# Altium PCB PCB1.PcbDoc (part 2 of 3)
Units mm, origin at the board's own origin, x right, y up, seen from the top; angles counter-clockwise.
Board outline 160 x 120 mm, 2 copper layers (Top Layer, Bottom Layer), stack 1.575 mm thick; 297 components, 194 nets, 893 pads, 504 vias.
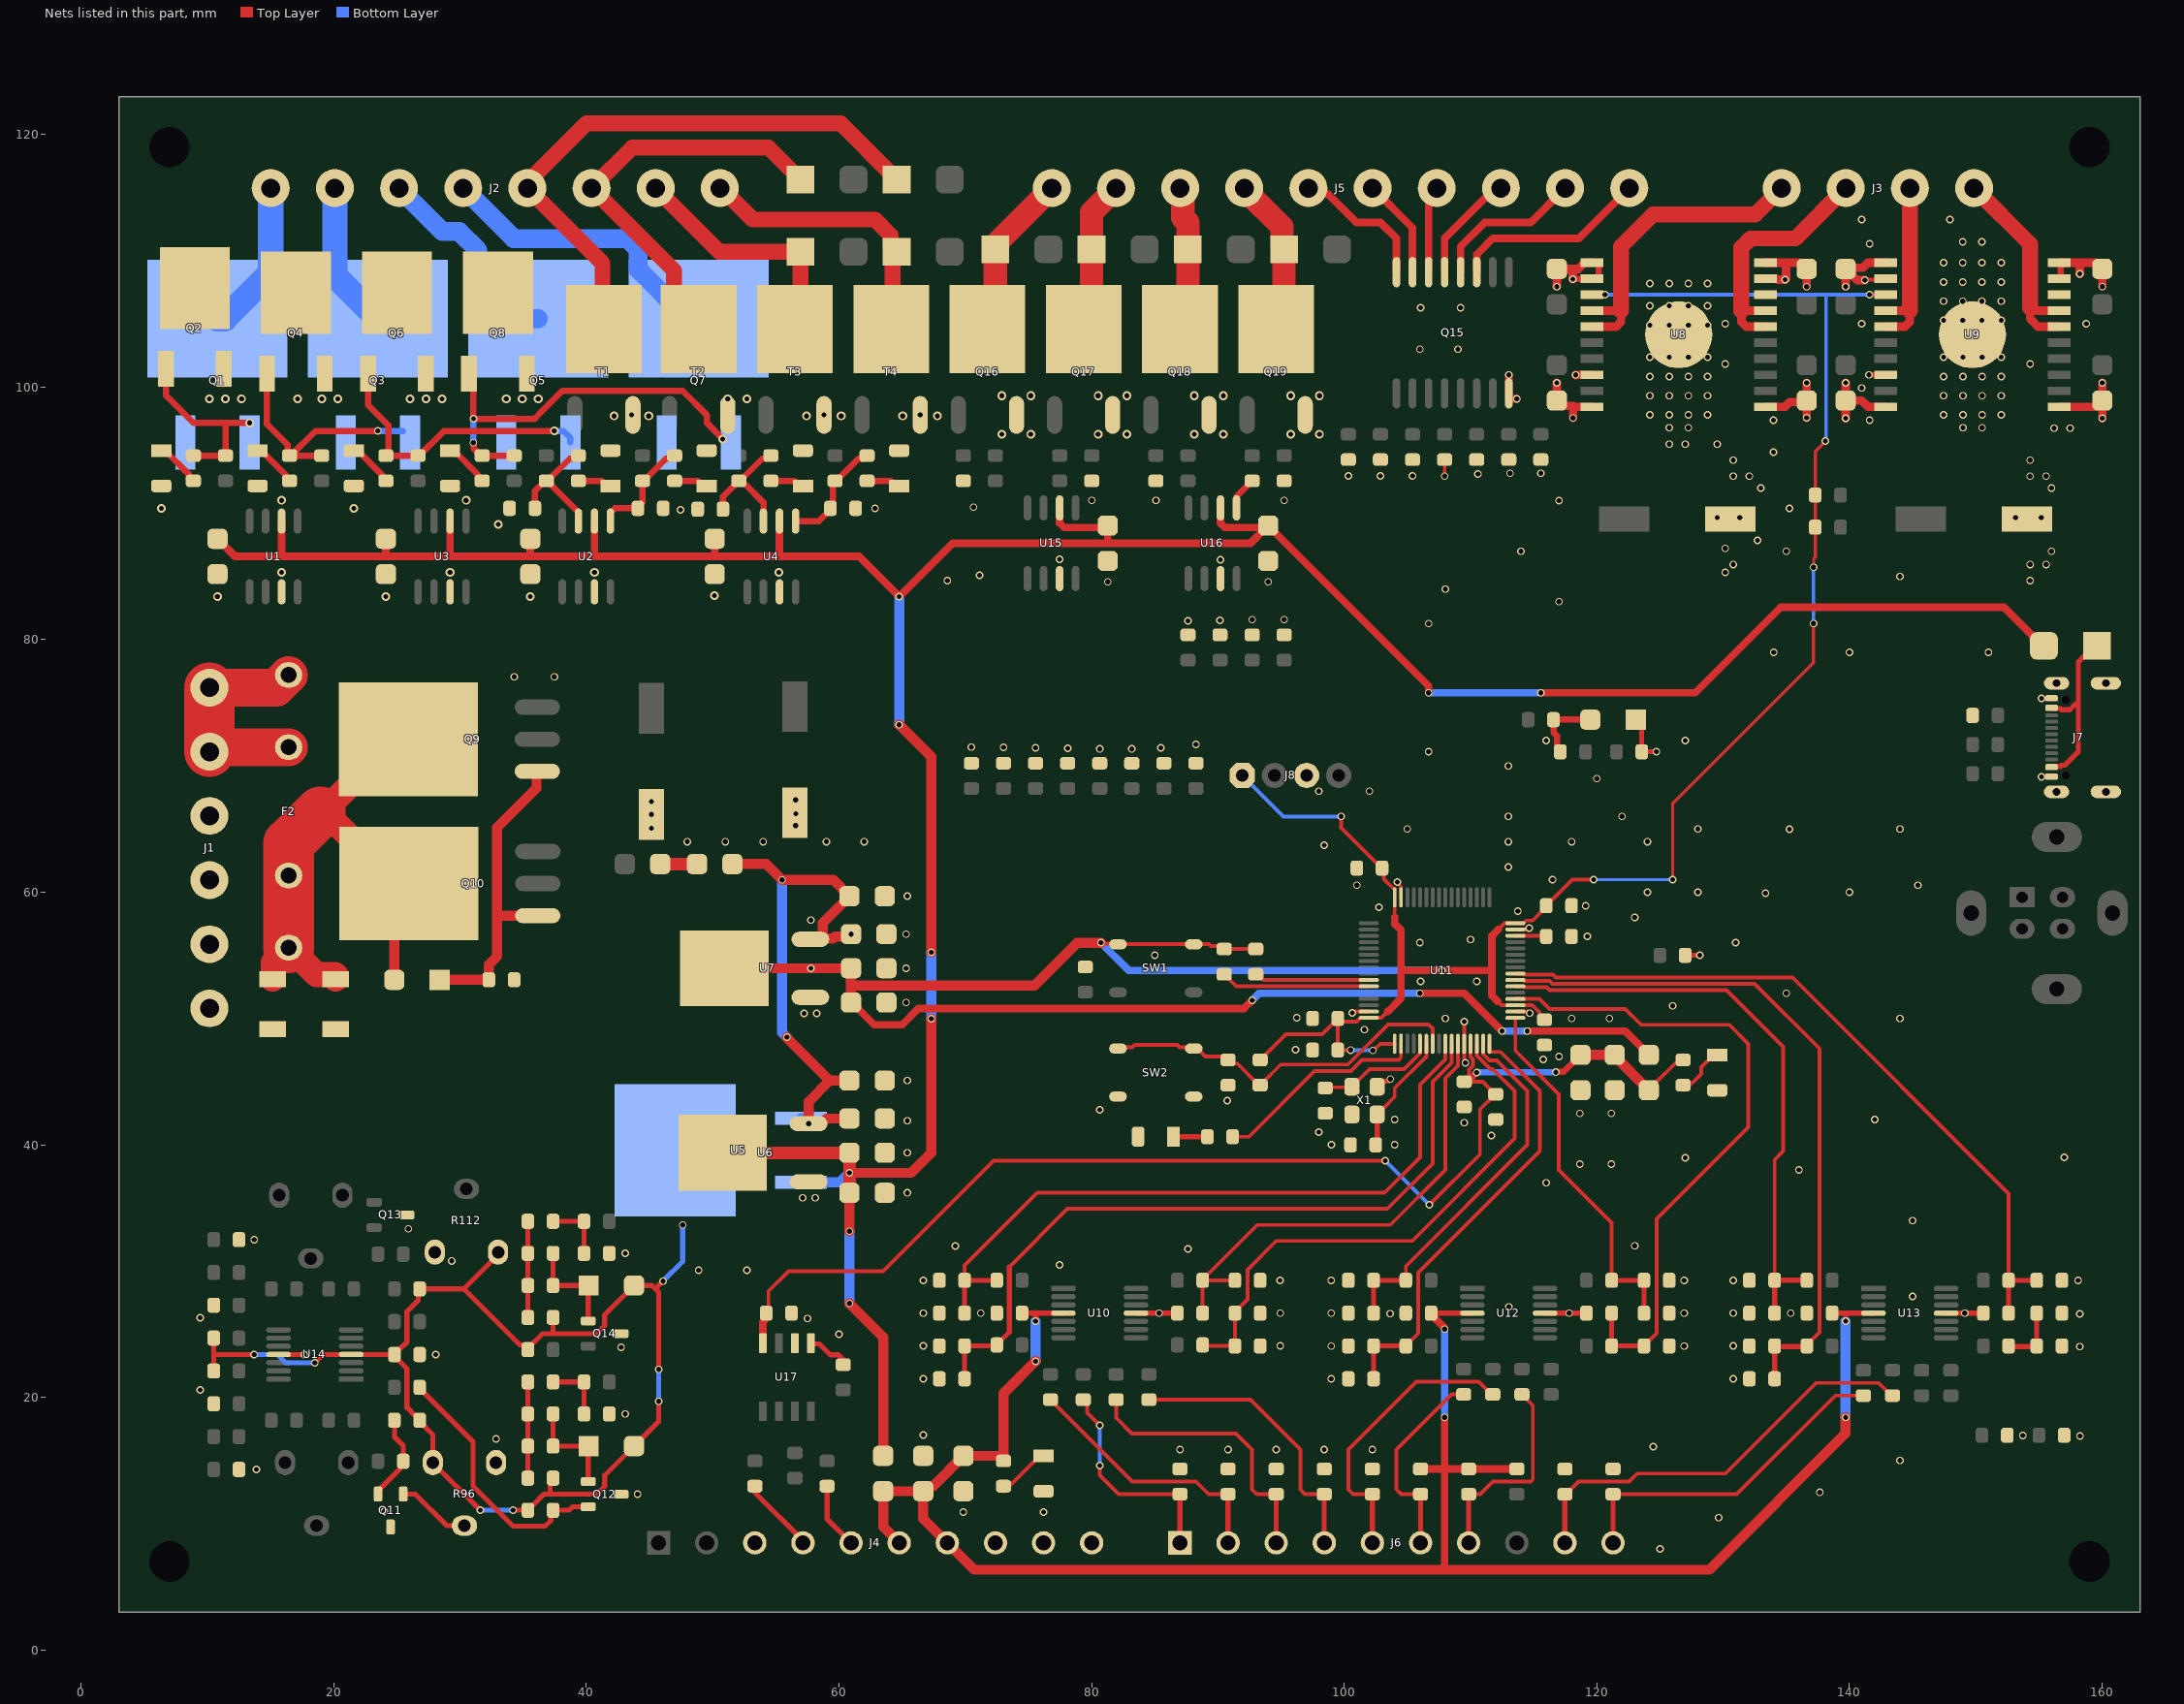
[diagram p2: the nets of this part, all layers, seen from the top]

## Via types
v1: diameter 0.6, hole 0.4, Top Layer to Bottom Layer, 445 vias
v2: diameter 0.7, hole 0.4, Top Layer to Bottom Layer, 59 vias

## Nets (pads, with @x,y where several pads share a name; then routed paths per layer and width w, separated by ;. In a path a pad name is that pad's centre, name@x,y a point inside that pad or via, vN(x,y) a via of type N, cw(c..) or ccw(c..) an arc to the next point about the centre after c; other vN are vias at no path point)
3.3V: C15.2 C16.2 C30.2 C31.2 C32.2 C33.2 C34.2 FB3.2 J8.1 R32.2 R33.2 R45.2 R66.2 R67.2 SW1.1 SW1.4 U7.4 U8.13 U9.13 U11.1 U11.19 U11.32 U11.48 U11.64 | length 295.4
  Top Layer w0.254: v1(126,61) 126,67 137.16,78.16 v1(137.16,81.273) ; v1(137.16,85.725) 137.168,85.733 137.168,86.406 137.295,86.533 R33.2@137.295,88.9 R32.2@137.295,91.44 137.295,94.915 v1(138.095,95.715)
  Top Layer w0.3: v1(80.75,56) 80.807,55.943 82.072,55.943 82.115,55.9 88.065,55.9 SW1.4@88.09,55.875 88.115,55.9 89.3,55.9 89.45,55.75 90.25,55.75 R67.2@90.5,55.5 R66.2@93,55.5 ; R45.2@93.345,46.72 93.391,46.72 93.795,47.124 93.795,47.17 95.39,48.765 98.265,48.765 C31.2@99.5,50 ; C30.2@99.5,47.5 v1(100.5,47.5) ; C30.2@99.695,47.625 99.5,47.82 C31.2@99.5,50 ; v1(99.75,66) 99.75,65.114 102.566,62.298 102.658,62.298 102.664,62.292 102.664,62.2 C33.2@102.977,61.887 ; v1(102.274,47.476) 102.324,47.476 102.849,48 U11.1@104,48 ; C33.2@103,61.91 103.125,61.784 103.125,61.045 103.957,60.214 104,60.214 U11.48@104,59.6 104,58 ; 103.45,50.55 102.95,50.05 U11.64@101.95,50.05 101.3,50.05 101,49.75 99.75,49.75 C31.2@99.5,50 ; 112.15,51.35 112.45,51.05 U11.19@113.55,51.05 114.897,51.05 115.472,50.476 115.472,50.237 115.814,49.895 C34.2@115.86,49.895 ; 112.2,57.05 112.7,57.55 U11.32@113.55,57.55 U11.32@114.2,57.55 ; U11.32@114.2,57.551 114.399,57.75 114.917,57.75 116,58.833 116,58.978 116.342,59.321 116.388,59.321 118.067,61 v1(119.742,61) ; U8.13@119.62,107.315 v1(120.65,107.315) ; v1(141.605,107.315) U9.13@142.875,107.315
  Top Layer w0.6: C16.2@60.957,51.267 61.011,51.267 62.778,49.5 65,49.5 66.3,50.8 92.075,50.8 v1(92.71,51.435) ; 103.45,50.55 104.5,51.6 104.5,53.8 ; 104,58 104,57.5 104.5,57 104.5,53.8 ; v1(106,52) 109.5,52 v1(112.5,49) ; 112.15,51.35 111.7,51.8 111.7,53.8 ; 112.2,57.05 111.7,56.55 111.7,53.8 ; v1(114.5,49) 122.243,49 FB3.2@124.123,47.12 ; 104.5,53.8 v1(107.75,53.8) 111.7,53.8
  Top Layer w0.8: U7.4@50.927,53.975 50.99,53.975 v1(57.785,53.975) C15.2@60.957,53.975 60.957,52.621 ; C16.2@60.957,51.267 60.957,52.621 ; v1(80.75,56) 78.86,56 75.481,52.621 60.957,52.621
  Bottom Layer w0.254: v1(119.742,61) v1(126,61) ; v1(137.16,81.273) v1(137.16,85.725) ; v1(138.095,95.715) 138.141,95.761 138.141,107.315
  Bottom Layer w0.3: J8.1@91.94,69.25 95.19,66 v1(99.75,66) ; v1(100.5,47.5) 100.512,47.488 102.262,47.488 v1(102.274,47.476) ; v1(120.65,107.315) 138.141,107.315 v1(141.605,107.315)
  Bottom Layer w0.6: v1(80.75,56) 82.95,53.8 v1(107.75,53.8) ; v1(92.71,51.435) 93.275,52 v1(106,52) ; v1(112.5,49) v1(114.5,49)
3.3VA: C17.2 C18.2 C35.2 C36.2 C63.2 FB3.1 R31.2 U11.13 U17.8 | length 99.5
  Top Layer w0.3: C63.2@54.245,26.673 54.42,26.848 54.42,28.42 56,30 63.5,30 72.25,38.75 v1(103.25,38.75) ; v1(106.75,35.25) 110.75,39.25 110.75,42.8 111.95,44 C36.2@111.954,44 ; C35.2@109.5,45 C35.2@109.546,45 ; C35.2@109.743,45.197 C35.2@109.546,45 ; C35.2@109.888,45.342 109.888,45.94 110.2,46.251 110.2,46.749 110,46.949 U11.13@110,48 ; C36.2@112,44 C36.2@111.954,44 ; FB3.1@124.123,44.366 126.832,47.074 R31.2@126.832,47.12 ; C35.2@109.546,45 109.855,45 110,45 110.974,45 111.15,44.824 111.15,44.804 C36.2@111.954,44
  Top Layer w0.5: C35.2@109.855,45.085 110,45.23 v1(110.49,45.72) ; v1(116.75,45.75) 116.769,45.769 117.356,45.769 C17.2@118.707,47.12
  Top Layer w0.6: U17.8@53.975,24.29 53.975,25.965 54.045,26.035 54.045,26.473 C63.2@54.245,26.673
  Top Layer w0.8: C17.2@118.707,47.12 121.323,47.12 124.077,44.366 FB3.1@124.123,44.366
  Bottom Layer w0.3: v1(103.25,38.75) v1(106.75,35.25)
  Bottom Layer w0.5: v1(110.49,45.72) 110.505,45.735 116.735,45.735 v1(116.75,45.75)
5V: C1.2 C2.2 C3.2 C4.2 C9.2 C10.2 C58.2 C61.2 C62.2 D20.2 D21.2 D22.2 FB2.2 R93.1 R96.3 R100.2 R102.1 R104.1 R109.1 R112.3 R116.2 R118.1 R120.1 U1.6 U2.6 U3.6 U4.6 U5.3 U6.4 U14.4 U15.6 U16.6 | length 380.5
  Top Layer w0.4: R116.2@10.5,24.694 10.5,23.394 ; R100.2@10.766,22.361 R100.2@10.5,22.094 10.5,23.394 ; v1(13.696,23.394) 10.5,23.394 ; v1(18.505,22.74) 19.159,23.394 U14.4@21.38,23.394 C58.2@24.8,23.394 ; v1(31.601,11.065) 27.85,14.816 R96.3@27.85,14.844 27.85,17.044 26.8,18.094 R93.1@26.8,18.194 26.8,18.267 26.504,18.563 26.431,18.563 25.8,19.194 25.8,22.26 25.1,22.96 25.1,22.967 24.8,23.267 C58.2@24.8,23.394 ; R112.3@33.008,31.503 33.008,31.303 30.3,28.594 ; v1(34.195,11.065) 35.297,11.065 35.666,11.434 35.739,11.434 36.64,12.335 37.139,12.335 ; R118.1@35.37,23.78 35.37,23.853 35.074,24.149 34.745,24.149 34.314,24.58 30.3,28.594 ; R118.1@35.37,23.88 36.54,25.05 37.37,25.05 ; R104.1@37.37,13.605 37.139,13.374 37.139,12.335 ; R120.1@37.37,26.32 37.37,25.05 ; v1(45.72,19.685) 45.72,18.085 41.45,13.815 41.45,12.97 40.815,12.335 37.139,12.335 ; v1(45.72,22.225) 45.72,28.341 45.46,28.6 ; v1(46.07,29.21) 45.46,28.6 ; C58.2@24.8,23.394 24.8,23.467 25.096,23.763 25.169,23.763 25.8,24.394 25.8,26.796 26.698,27.694 26.698,28.493 R109.1@26.8,28.594 30.3,28.594 ; 37.37,25.05 40.815,25.05 41.45,25.685 41.45,26.53 D22.2@43.78,28.86 45.201,28.86 45.46,28.6
  Top Layer w0.6: C1.2@10.795,87.985 12.195,86.585 15.875,86.585 ; U1.6@15.875,89.385 15.875,86.585 ; C3.2@24.13,87.985 24.13,86.585 ; U3.6@29.21,89.385 29.21,86.585 ; C2.2@35.56,87.985 35.56,86.585 ; U2.6@40.64,89.385 40.64,86.585 ; C4.2@50.165,87.985 50.165,86.585 ; U4.6@55.292,89.385 55.292,86.632 55.245,86.585 ; U15.6@77.47,90.43 77.47,89.222 77.821,88.87 81.12,88.87 C61.2@81.28,89.03 81.28,87.63 ; U16.6@90.207,90.43 90.207,89.222 90.558,88.87 C62.2@93.82,88.87 ; v1(106.68,75.79) 106.68,76.33 C62.2@93.98,89.03 C62.2@93.82,88.87 ; v1(115.57,75.79) 127.79,75.79 134.55,82.55 152.25,82.55 154.562,80.238 154.562,79.992 155.054,79.5 D20.2@155.3,79.5 ; 15.875,86.585 24.13,86.585 ; 24.13,86.585 29.21,86.585 ; 29.21,86.585 35.56,86.585 ; 35.56,86.585 40.64,86.585 ; 40.64,86.585 50.165,86.585 ; 50.165,86.585 55.245,86.585 ; 55.245,86.585 61.595,86.585 v1(64.77,83.41) 68.99,87.63 81.28,87.63 ; 81.28,87.63 92.58,87.63 C62.2@93.82,88.87
  Top Layer w0.8: v1(60.83,27.435) 63.5,24.765 FB2.2@63.5,15.37 ; v1(60.83,33.15) C10.2@60.83,36.195 ; v1(60.83,37.782) 65.722,37.782 67.31,39.37 v1(67.31,49.973) ; v1(64.77,73.25) 67.31,70.71 v1(67.31,55.245)
  Top Layer w1: U6.4@50.8,39.37 C9.2@60.83,39.37 v1(60.83,37.782) C10.2@60.83,36.195
  Bottom Layer w0.4: v1(13.696,23.394) 15.549,23.394 16.203,22.74 v1(18.505,22.74) ; v1(31.601,11.065) v1(34.195,11.065) ; v1(45.72,19.685) v1(45.72,22.225) ; v1(46.07,29.21) 47.625,30.765 v1(47.625,33.655)
  Bottom Layer w0.6: v1(106.68,75.79) v1(115.57,75.79)
  Bottom Layer w0.8: U5.3@56.996,37.02 60.068,37.02 v1(60.83,37.782) ; v1(60.83,27.435) v1(60.83,33.15) ; v1(64.77,73.25) v1(64.77,83.41) ; v1(67.31,49.973) v1(67.31,55.245)
5VA: C11.2 C12.2 C53.2 C54.2 C55.2 FB2.1 J4.6 J4.7 R29.2 R58.2 R64.2 R73.2 U10.4 U12.4 U13.4 | length 156.7
  Top Layer w0.3: v1(139.7,26.035) 139.7,26.674
  Top Layer w0.4: C53.2@74.495,26.67 75.565,26.67 U10.4@77.77,26.67 ; C54.2@106.88,26.67 U12.4@110.155,26.67 ; C55.2@138.63,26.67 138.63,26.674 139.7,26.674 141.901,26.674 U13.4@141.905,26.67
  Top Layer w0.5: v1(75.565,26.035) 75.565,26.67
  Top Layer w0.6: R58.2@106.045,14.335 107.95,14.335 ; C54.2@106.88,26.67 106.88,26.57 107.95,25.5 v1(107.95,25.4) ; 107.95,6.35 107.95,14.335 ; v1(107.95,18.415) 107.95,14.335 ; R73.2@113.665,14.335 R64.2@109.855,14.335 107.95,14.335
  Top Layer w0.8: J4.6@64.77,8.48 63.5,9.75 FB2.1@63.5,12.57 C11.2@66.675,12.57 ; v1(75.565,22.86) 73.025,20.32 73.025,15.37 70.168,15.37 C12.2@69.85,15.37 67.45,12.97 67.075,12.97 C11.2@66.675,12.57 ; v1(139.7,18.415) 139.7,17.145 128.905,6.35 107.95,6.35 70.71,6.35 J4.7@68.58,8.48 66.675,10.385 C11.2@66.675,12.57
  Bottom Layer w0.6: v1(107.95,18.415) v1(107.95,25.4)
  Bottom Layer w0.8: v1(75.565,22.86) v1(75.565,26.035) ; v1(139.7,18.415) v1(139.7,26.035)
+EGT: J4.5 R145.1 | length 4.9
  Top Layer w0.4: R145.1@59.055,12.57 59.055,10.385 J4.5@60.96,8.48
-EGT: J4.4 R144.2 | length 5.7
  Top Layer w0.4: R144.2@53.34,12.57 53.34,12.462 57.15,8.652 J4.4@57.15,8.48
ANALOG-INPUT-1: J6.9 R77.2 R79.1 | length 33.9
  Top Layer w0.3: R79.1@117.475,12.335 117.575,12.335 118.575,13.335 122.555,13.335 123.19,13.97 130.175,13.97 137.35,21.145 142.314,21.145 143.314,20.145 R77.2@143.414,20.145
  Top Layer w0.4: J6.9@117.475,8.48 R79.1@117.475,12.335
ANALOG-INPUT-2: J6.10 R81.2 R83.1 | length 26.9
  Top Layer w0.3: R83.1@121.285,12.335 131.08,12.335 138.89,20.145 R81.2@141.105,20.145
  Top Layer w0.4: J6.10@121.285,8.48 R83.1@121.285,12.335
AUX_RELAY_OUT: J5.8 Q15.13 | length 8.8
  Top Layer w0.6: Q15.13@107.95,109.095 107.95,111.76 111.94,115.75 J5.8@112.41,115.75
CLT-SENSOR: J6.7 R64.1 R65.2 | length 16.5
  Top Layer w0.3: R64.1@109.855,12.335 110.76,12.335 111.76,13.335 114.759,13.335 114.935,13.511 114.935,19.372 R65.2@114.072,20.236
  Top Layer w0.4: J6.7@109.855,8.48 R64.1@109.855,12.335
COND-ANALOG-INPUT-1: C49.2 R78.1 R80.1 U11.22 | length 47.1
  Top Layer w0.3: U11.22@113.55,52.55 114.2,52.55 114.273,52.477 116.023,52.477 116.25,52.25 130.25,52.25 134.75,47.75 134.75,39.5 134.08,38.83 R80.1@134.08,29.27
  Top Layer w0.4: C49.2@134.08,26.67 R80.1@134.08,29.27 134.206,29.274 136.626,29.274 R78.1@136.63,29.27
COND-ANALOG-INPUT-2: C50.2 R82.1 R84.1 U11.23 | length 55.5
  Top Layer w0.3: U11.23@113.55,53.05 114.2,53.05 114.273,52.977 116.273,52.977 116.5,52.75 132.5,52.75 137.63,47.62 137.63,25.17 136.584,24.124 136.584,24.07 R82.1@136.584,24.024
  Top Layer w0.4: C50.2@134.08,21.47 134.08,23.898 R84.1@134.206,24.024 ; R84.1@134.08,24.07 134.08,24.024 R84.1@134.206,24.024 ; R82.1@136.584,24.024 R84.1@134.206,24.024
COND-ANALOG-INPUT-3: C51.2 R86.1 R88.1 U11.24 | length 57.9
  Top Layer w0.3: U11.24@113.55,53.55 114.2,53.55 114.273,53.477 116.523,53.477 116.75,53.25 135.5,53.25 152.605,36.145 R86.1@152.605,29.27
  Top Layer w0.4: R88.1@152.605,26.67 R86.1@152.605,29.27 ; R86.1@152.731,29.224 152.777,29.27 C51.2@154.83,29.27
COND-ANALOG-INPUT-4: C52.2 R90.1 R92.1 | length 4.9
  Top Layer w0.4: R90.1@152.731,24.024 152.806,24.024 152.856,24.074 152.906,24.024 R92.1@154.956,24.024 ; R92.1@154.83,24.07 C52.2@154.83,26.67
COND-CLT-SENSOR: C46.2 R69.1 R70.1 U11.17 | length 29.1
  Top Layer w0.3: U11.17@113.55,50.05 113.55,47.45 117,44 117,38 121.18,33.82 R69.1@121.18,29.27
  Top Layer w0.4: R69.1@121.18,29.27 R70.1@123.73,29.27 C46.2@123.73,26.67
COND-ETB-1-SENSOR-1: C29.2 R35.1 R37.1 U11.9 | length 56.2
  Top Layer w0.3: R37.1@69.945,29.27 69.945,30.445 75.695,36.195 103.195,36.195 106,39 106,44.75 108,46.75 U11.9@108,48 ; R37.1@70.163,29.606 70.499,29.27
  Top Layer w0.4: C29.2@69.945,26.67 R37.1@69.945,29.27 70.499,29.27 R35.1@72.495,29.27
COND-ETB-1-SENSOR-2: C37.2 R39.1 R41.1 U11.10 | length 58.8
  Top Layer w0.3: 73.495,30.336 78.084,34.925 103.425,34.925 107,38.5 107,45 108.5,46.5 U11.10@108.5,48
  Top Layer w0.4: C37.2@69.945,21.47 R41.1@69.945,24.07 70.214,24.07 70.214,24.043 70.241,24.07 72.413,24.07 R39.1@72.495,24.152 72.495,24.17 73.495,25.17 73.495,30.336
COND-ETB-2-SENSOR-1: C38.2 R43.1 R46.1 U11.11 | length 38.4
  Top Layer w0.3: R46.1@88.795,26.67 R43.1@88.795,29.27 ; C38.2@91.345,29.27 R43.1@88.795,29.27 ; U11.11@109,48 109,46.25 108,45.25 108,38 103.655,33.655 93.134,33.655 88.795,29.316 R43.1@88.795,29.27
COND-ETB-2-SENSOR-2: C41.2 R48.1 R51.1 U11.14 | length 43.4
  Top Layer w0.3: R48.1@88.795,24.155 88.795,24.07 R51.1@91.345,24.07 C41.2@91.345,26.67 91.345,26.77 92.345,27.77 92.345,30.115 94.615,32.385 105.385,32.385 113.5,40.5 113.5,44.25 111.75,46 111.566,46 110.5,47.066 U11.14@110.5,48
COND-IAT-SENSOR: C45.2 R60.1 R61.1 U11.16 | length 35.7
  Top Layer w0.3: R60.1@104.88,24.07 105.87,25.06 105.87,29.87 115.5,39.5 115.5,44.25 112.398,47.352 111.5,47.352 U11.16@111.5,48
  Top Layer w0.4: C45.2@102.33,21.47 R61.1@102.33,24.07 R60.1@104.88,24.07
COND-MAP-SENSOR: C44.2 R54.1 R57.1 U11.15 | length 29.7
  Top Layer w0.3: R54.1@104.88,29.27 104.88,30.38 114.5,40 114.5,44.25 112.074,46.676 111.494,46.676 111,47.17 U11.15@111,48
  Top Layer w0.4: C44.2@102.33,26.67 R57.1@102.33,29.27 R54.1@104.88,29.27
COND-OIL-SENSOR: C48.2 R75.1 R76.1 U11.20 | length 52.4
  Top Layer w0.3: U11.20@113.55,51.55 115.45,51.55 116.25,50.75 122.25,50.75 123.5,49.5 130.5,49.5 132,48 132,41.399 124.73,34.129 124.73,25.07 R76.1@123.73,24.07
  Top Layer w0.4: C48.2@121.18,26.67 R75.1@121.18,24.07 R76.1@123.73,24.07
DBW1_MOTOR1: J3.2 U8.6 U8.7 | length 20.1
  Top Layer w0.68: U8.6@133.35,104.775 131.843,104.775 131.445,105.173 131.445,106.045 U8.7@133.35,106.045
  Top Layer w1.25: 131.445,106.045 131.445,111.028 132.177,111.76 135.72,111.76 J3.2@139.71,115.75
DBW1_MOTOR2: J3.1 U8.14 U8.15 | length 25.3
  Top Layer w0.68: U8.15@119.62,104.775 121.522,104.775 121.92,105.173 121.92,106.045 U8.14@119.62,106.045
  Top Layer w1.25: 121.92,106.045 121.92,111.125 124.46,113.665 132.545,113.665 J3.1@134.63,115.75
DBW2_MOTOR1: J3.4 U9.6 U9.7 | length 17.1
  Top Layer w0.68: 154.305,106.282 154.305,105.846 ; U9.6@156.605,104.775 154.94,104.775 154.305,105.41 154.305,105.846 ; U9.7@156.605,106.045 154.504,106.045 154.305,105.846
  Top Layer w1.25: J3.4@149.87,115.75 154.305,111.315 154.305,106.282
DBW2_MOTOR2: J3.3 U9.14 U9.15 | length 14.6
  Top Layer w0.68: U9.15@142.875,104.775 144.382,104.775 144.78,105.173 144.78,106.045 U9.14@142.875,106.045
  Top Layer w1.25: 144.78,106.045 144.78,115.74 J3.3@144.79,115.75
ETB-1-SENSOR-1: J6.1 R34.2 R36.1 | length 17.4
  Top Layer w0.3: R34.2@79.345,19.82 79.636,19.529 79.636,18.789 v1(80.645,17.78) ; v1(80.645,14.605) 80.645,13.825 82.135,12.335 R36.1@86.995,12.335
  Top Layer w0.4: J6.1@86.995,8.48 R36.1@86.995,12.335
  Bottom Layer w0.3: v1(80.645,14.605) v1(80.645,17.78)
ETB-1-SENSOR-2: J6.2 R38.2 R40.1 | length 21
  Top Layer w0.3: R38.2@76.745,19.82 76.791,19.82 77.195,19.416 77.195,19.37 83.23,13.335 88.265,13.335 89.265,12.335 R40.1@90.805,12.335
  Top Layer w0.4: J6.2@90.805,8.48 R40.1@90.805,12.335
ETB-2-SENSOR-1: J6.3 R42.2 R44.1 | length 22.3
  Top Layer w0.3: R42.2@81.945,19.82 81.945,18.385 83.185,17.145 91.44,17.145 92.71,15.875 92.71,12.7 93.075,12.335 R44.1@94.615,12.335
  Top Layer w0.4: J6.3@94.615,8.48 R44.1@94.615,12.335
ETB-2-SENSOR-2: J6.4 R47.2 R49.1 | length 22.7
  Top Layer w0.3: R47.2@84.545,19.82 92.575,19.82 96.52,15.875 96.52,12.7 96.885,12.335 R49.1@98.425,12.335
  Top Layer w0.4: J6.4@98.425,8.48 R49.1@98.425,12.335
FUEL_PUMP_RELAY_OUT: J5.6 Q15.15 | length 8
  Top Layer w0.6: J5.6@102.25,115.75 105.41,112.59 Q15.15@105.41,109.095
GAS_SOLENOID_RELAY_OUT: J5.7 Q15.14 | length 6.9
  Top Layer w0.6: Q15.14@106.68,109.095 106.68,114.451 107.33,115.101 J5.7@107.33,115.75
GI1: R2.2 R4.2 R23.2 U2.7 | length 10.2
  Top Layer w0.5: R4.2@35.925,90.395 35.925,91.765 36.73,92.57 R2.2@36.83,92.57 R2.2@36.93,92.57 ; U2.7@39.37,89.385 39.37,90.085 37.18,92.275 37.18,92.32 R2.2@36.93,92.57 ; R23.2@39.37,94.57 39.12,94.32 38.68,94.32 R2.2@36.93,92.57
GI2: R9.2 R11.2 R27.2 U2.5 | length 8.7
  Top Layer w0.5: U2.5@41.91,89.385 41.91,90.058 42.247,90.395 R11.2@44.085,90.395 44.085,90.495 44.45,90.86 R9.2@44.45,92.57 44.55,92.57 46.3,94.32 46.74,94.32 R27.2@46.99,94.57
GI3: R17.2 R18.2 R24.2 U4.7 | length 10
  Top Layer w0.127: U4.7@54.022,89.385 53.999,89.361 U4.7@54.082,89.278
  Top Layer w0.5: R18.2@50.816,90.322 50.826,90.333 50.826,91.326 51.72,92.22 51.72,92.32 51.97,92.57 R17.2@52.07,92.57 ; R17.2@52.302,92.703 53.92,94.32 54.36,94.32 R24.2@54.61,94.57 ; R17.2@52.31,92.563 52.31,92.43 52.42,92.32 52.552,92.32 54.022,90.85 U4.7@54.022,89.385
GI4: R19.2 R20.2 R28.2 U4.5 | length 9
  Top Layer w0.5: U4.5@56.562,89.385 58.415,89.385 59.325,90.295 R20.2@59.325,90.395 59.507,90.577 59.507,92.32 R19.2@59.757,92.57 ; R19.2@59.69,92.57 R19.2@59.757,92.57 ; R28.2@62.23,94.57 61.98,94.32 61.54,94.32 59.79,92.57 R19.2@59.757,92.57
GND: C1.1 C2.1 C3.1 C4.1 C5.2 C6.2 C7.1 C8.1 C9.1 C10.1 C11.1 C12.1 C13.1 C14.1 C15.1 C16.1 C17.1 C18.1 C19.1 C20.1 C21.2 C22.1 C23.1 C24.1 C25.1 C26.2 C27.1 C28.1 C29.1 C30.1 C31.1 C32.1 C33.1 C34.1 C35.1 C36.1 C37.1 C38.1 C39.1 C40.1 C41.1 C42.1 C43.1 C44.1 C45.1 C46.1 C47.1 C48.1 C49.1 C50.1 C51.1 C52.1 C53.1 C54.1 C55.1 C57.1 C58.1 C60.1 C61.1 C62.1 C63.1 D5.2 D6.2 D7.2 D8.2 D9.2 D10.2 D11.2 D12.2 D13.1 D14.1 D16.2 D17.2 D18.2 D19.1 J1.1 J1.2 J1.3 J1.4 J4.3 J4.8 J4.9 J4.10 J7.A1B12 J7.B1A12 J7.SH1 J7.SH2 J7.SH3 J7.SH4 J8.3 Q1.3 Q2.3 Q3.3 Q4.3 Q5.3 Q6.3 Q7.3 Q8.3 Q11.3 Q12.3 Q13.3 Q14.3 Q15.8 Q16.3 Q17.3 Q18.3 Q19.3 R4.1 R5.1 R6.1 R7.1 R8.1 R11.1 R13.1 R14.1 R15.1 R16.1 R18.1 R20.1 R30.1 R36.2 R37.2 R40.2 R41.2 R44.2 R46.2 R49.2 R50.1 R51.2 R56.2 R57.2 R61.2 R68.1 R70.2 R72.1 R76.2 R79.2 R80.2 R83.2 R84.2 R87.2 R88.2 R91.2 R92.2 R96.1 R101.1 R103.2 R112.1 R117.1 R119.2 R125.1 R126.1 R127.1 R128.1 R129.1 R130.1 R131.1 R133.1 R135.1 R136.1 R137.1 R139.1 R141.1 R142.1 R143.1 R146.1 SW2.2 SW2.3 T1.3 T2.3 T3.3 T4.3 U1.3 U2.3 U3.3 U4.3 U5.4 U6.1 U7.1 U8.1 U8.8 U8.9 U8.10 U8.11 U8.12 U8.18 U8.20 U8.21 U9.1 U9.8 U9.9 U9.10 U9.11 U9.12 U9.18 U9.20 U9.21 U10.11 U11.12 U11.18 U11.31 U11.47 U11.63 U12.11 U13.11 U14.11 U15.3 U16.3 U17.5 U17.6 X1.2 X1.4 | length 101.4
  Top Layer w0.3: v1(70.485,71.485) v1@70.5,71.5 ; R16.1@85.725,70.215 R16.1@85.745,70.235 ; v1(100.633,50.438) 100.715,50.438 100.827,50.55 U11.63@101.95,50.55 ; v1(104.205,60.814) 104.205,60.733 104.5,60.438 U11.47@104.5,59.6 ; v1(107.95,92.935) R128.1@107.95,94.25 ; v1(109.5,49.75) 109.5,49 U11.12@109.5,48 109.5,46.681 109.6,46.581 v1(109.6,46.5) ; U11.18@113.55,50.55 114.467,50.55 114.599,50.419 v1(114.68,50.419) ; U11.31@113.55,57.05 114.466,57.05 114.566,57.15 v1(114.647,57.15) ; v1(141.224,108.458) 141.281,108.515 142.805,108.515 U9.12@142.875,108.585 ; v1@153.715,16.99 v1(153.725,16.98) ; R87.2@157,17 R87.2@157.025,16.975
  Top Layer w0.4: R117.1@12.5,32.494 12.508,32.409 R117.1@12.593,32.494 ; U14.11@14.989,23.394 U14.11@15.629,23.394 v1(17.685,23.394) ; Q13.3@25.8,34.444 25.847,34.444 Q13.3@25.997,34.294 ; U17.5@57.785,24.29 57.849,24.226 58.451,24.226 59.306,23.371 59.957,23.371 R146.1@60.338,22.99 ; SW2.2@82.066,43.796 SW2.2@82.09,43.82 ; U10.11@83.52,26.67 v1(85.345,26.67) R46.2@86.795,26.67 ; C30.1@97.163,47.837 C30.1@97.5,47.5 ; C31.1@97.5,50 C31.1@97.5,50.058 ; X1.2@100.61,42.35 X1.2@100.61,42.4 ; X1.4@102.61,44.6 102.61,44.7 102.948,45.038 103.434,45.038 103.596,45.2 v1(103.65,45.2) ; R127.1@105.41,93.958 R127.1@105.702,94.25 ; R128.1@107.95,94.25 R128.1@107.965,94.235 ; U12.11@115.905,26.67 115.907,26.668 v1(117.812,26.668) 117.814,26.666 117.818,26.67 C48.1@119.18,26.67 ; C42.1@118,56.5 118.069,56.431 C42.1@118.139,56.5 ; D19.1@123.085,73.66 123.555,73.19 R72.1@123.555,71.12 v1(124.714,71.12) ; C47.1@127,55 v1(128.152,55) ; R80.2@132.16,29.27 R80.2@132.206,29.224 ; v1(141.54,100.965) U9.18@142.875,100.965 ; U13.11@147.655,26.67 v1(149.133,26.67) R88.2@150.605,26.67 ; R88.2@150.817,26.713 R88.2@150.856,26.674 ; v1(155.204,69.141) 155.209,69.145 155.995,69.145 J7.A1B12@156,69.15 ; v1(155.204,75.35) J7.B1A12@156,75.35
  Top Layer w0.5: C36.1@112.031,42.006 C36.1@112.2,42.175 ; v1(118.11,108.548) 118.128,108.567 119.601,108.567 U8.12@119.62,108.585 120.045,108.585 120.135,108.675 120.135,109.765 120.045,109.855 U8.11@119.62,109.855 ; U9.9@156.605,108.585 156.695,108.675 156.725,108.675 156.725,109.765 156.695,109.765 U9.10@156.605,109.855
  Top Layer w0.6: v1(113.03,100.965) Q15.8@113.03,99.495 113.03,99.06 v1(113.665,99.06)
  Top Layer w0.68: U6.1@57.12,36.83 57.36,37.07 U6.1@57.6,37.07 57.88,37.07 U6.1@58.12,36.83 ; U7.1@57.247,51.435 57.487,51.675 U7.1@57.727,51.675 ; U7.1@57.747,51.695 U7.1@57.727,51.675 ; U7.1@58.247,51.436 58.486,51.675 U7.1@57.727,51.675 ; v1(116.84,100.33) C19.1@116.84,98.93 117.263,98.507 118.118,98.507 ; v1(116.84,107.95) C23.1@116.84,109.35 118.11,109.35 ; v1(118.11,108.548) 118.11,109.35 ; v1(118.118,97.544) 118.118,98.507 ; v1(118.339,100.956) 118.348,100.965 U8.18@119.62,100.965 ; U8.20@119.62,98.425 118.2,98.425 118.118,98.507 ; U8.11@119.62,109.855 119.045,109.855 118.54,109.35 118.11,109.35 ; D19.1@122.936,73.66 D19.1@123.085,73.66 ; U8.1@133.35,98.425 134.9,98.425 135.288,98.813 136.501,98.813 C20.1@136.618,98.93 ; U8.9@133.35,108.585 134.239,108.585 134.329,108.495 v1(134.911,108.495) 134.982,108.566 134.982,109.855 ; U8.10@133.35,109.855 134.982,109.855 ; v1(136.618,97.57) C20.1@136.618,98.93 ; v1(136.618,100.33) C20.1@136.618,98.93 ; v1(136.618,107.95) C22.1@136.618,109.35 136.586,109.35 136.081,109.855 134.982,109.855 ; v1(139.7,97.536) C24.1@139.7,98.93 ; v1(139.7,100.33) C24.1@139.7,98.93 ; v1(139.7,107.95) C28.1@139.7,109.35 139.732,109.35 140.624,108.458 v1(141.224,108.458) ; C28.1@139.789,109.439 141.059,109.439 141.475,109.855 U9.11@142.875,109.855 ; C24.1@140.123,98.507 C24.1@139.7,98.93 ; U9.20@142.875,98.425 141.475,98.425 140.97,98.93 C24.1@139.7,98.93 ; v1(153.162,89.662) 153.547,89.662 153.674,89.535 C21.2@154.06,89.535 ; U9.1@156.605,98.425 159.483,98.425 159.988,98.93 C25.1@160.02,98.93 ; U9.10@156.605,109.855 158.242,109.855 ; v1(158.242,108.966) 158.242,109.855 ; v1(160.02,97.536) C25.1@160.02,98.93 ; v1(160.02,100.33) C25.1@160.02,98.93 ; v1(160.02,107.95) C27.1@160.02,109.35 159.988,109.35 159.483,109.855 158.242,109.855
  other v1: 125,8 129.65,10.48 69.85,10.922 76.2,10.922 24,11 44.053,12.335 137.65,12.48 13.875,14.294 144,15 86.995,15.875 90.805,15.875 94.615,15.875 98.425,15.875 102.235,15.875 124.46,16.1 32.85,16.705 158.256,16.95 66.675,17.018 43.085,18.685 9.43,20.59 66.67,21.47 98.964,21.466 130.805,21.47 28.083,23.394 42.76,23.966 158.231,24.024 98.964,24.066 126.914,24.066 66.67,24.07 94.945,24.07 130.805,24.07 60,25 57.5,26.25 9.43,26.305 158.231,26.624 103.637,26.637 66.67,26.67 71.229,26.668 94.945,26.67 98.964,26.666 126.914,26.666 130.805,26.666 135.355,26.67 113.03,27.17 145,28 66.67,29.27 94.928,29.27 98.964,29.266 126.914,29.266 130.805,29.27 158.105,29.27 48.895,30.07 52.705,30.07 77.47,30.48 29.338,30.807 43.07,31.4 87.63,31.75 69.215,31.975 123,32 13.7,32.494 25.907,33.347 145,34 57.12,35.81 58.12,35.81 65.405,36.195 116,37 136,38 118.65,38.48 121.15,38.48 127,38.96 157,39 65.405,39.37 99,40 104,40 111.646,40.729 98,41 109.5,41.75 65.405,41.91 104,42 142,42 118.65,42.48 121.15,42.48 80.645,42.77 90.75,43.5 65.405,45.085 115.75,46.75 117,47 96.157,47.529 101.6,49.12 108,50 118,50 121,50 144,50 96.25,50.058 57.247,50.405 58.247,50.405 126,51 65.314,51.267 135,52 106.045,52.93 110.49,52.93 65.314,53.975 85,55 106,56 131,56 110,56.25 119.25,56.5 65.314,56.683 57.785,57.785 123,58 113.75,58.5 102.75,58.8 119.121,58.933 65.405,59.69 133.35,59.915 124,60 128,60 140,60 101,60.55 145.415,60.55 116.5,61 113,62 98.425,63.725 48,64 51,64 54,64 59,64 62,64 113,64 118,64 124,64 105,65 128,65 135.255,64.995 144,65 45.148,65.058 56.565,65.278 113,66 122,66 45.148,66.158 56.578,66.222 45.148,67.183 56.565,67.31 98,68 102,68 120,69 113,70 106.68,71.12 80.645,71.345 83.185,71.345 78.105,71.395 75.565,71.435 85.484,71.431 73.025,71.475 88.267,71.696 116,72 127,72 34.29,77.06 37.465,77.06 134,79 140,79 151,79 106.68,81.28 87.63,81.489 90.17,81.535 92.71,81.581 95.25,81.581 117,83 108,84 81.28,84.582 93.98,84.582 68.58,84.68 154.305,84.68 144,85 71.12,85.09 130.175,85.315 130.81,85.95 154.305,85.95 155.575,85.95 90.207,86.323 77.47,86.36 114,87 135,87 156,87 130.175,87.22 132.715,87.855 129.54,89.662 131.318,89.662 155.194,89.662 47.46,90.272 62.865,90.395 135.255,90.395 70.65,90.48 117,91 80.01,91.03 85.09,91.03 95.25,91.03 133,92 156,92 130.81,92.935 132.08,92.935 154.305,92.935 155.575,92.935 100.33,92.964 102.87,92.964 105.41,92.964 110.59,93.12 113.13,93.174 115.57,93.174 130.81,94.205 154.305,94.205 133.985,94.84 125.73,95.475 127,95.475 129.54,95.475 156.21,96.745 157.48,96.745 125.73,96.774 127.254,96.774 148.985,96.774 150.509,96.774 133.985,97.38 141.605,97.38 124.206,97.79 125.73,97.79 127.254,97.79 128.778,97.79 147.461,97.79 148.985,97.79 150.509,97.79 152.033,97.79 124.206,99.314 125.73,99.314 127.254,99.314 128.778,99.314 147.461,99.314 148.985,99.314 150.509,99.314 152.033,99.314 140.97,99.92 124.206,100.838 125.73,100.838 127.254,100.838 128.778,100.838 147.461,100.838 148.985,100.838 150.509,100.838 152.033,100.838 130.175,101.825 154.305,101.825 124.206,102.362 125.73,102.362 127.254,102.362 128.778,102.362 147.461,102.362 148.985,102.362 150.509,102.362 152.033,102.362 106,103 109,103 124.206,104.902 125.73,104.902 127.254,104.902 128.778,104.902 130.175,105 140.97,105 158.75,105 147.447,105.27 148.971,105.27 150.495,105.27 152.019,105.27 106.045,106.27 109.22,106.27 124.206,106.426 125.73,106.426 127.254,106.426 128.778,106.426 147.447,106.794 148.971,106.794 150.495,106.794 152.019,106.794 124.206,108.204 125.73,108.204 127.254,108.204 128.778,108.204 147.447,108.318 148.971,108.318 150.495,108.318 152.019,108.318 147.447,109.842 148.971,109.842 150.495,109.842 152.019,109.842 141.605,111.35 148.971,111.506 150.495,111.506 140.97,113.255 147.955,113.255
  other v2: 10.795,83.41 24.13,83.41 35.56,83.41 50.15,83.48 15.875,85.315 29.21,85.315 40.64,85.315 55.245,85.315 33.02,89.125 6.35,90.395 21.59,90.395 15.875,91.03 30.48,91.03 72.898,96.266 75.184,96.266 80.518,96.266 82.804,96.266 88.138,96.266 90.424,96.266 95.758,96.266 98.044,96.266 42.189,97.708 44.939,97.708 57.429,97.708 60.179,97.708 65.049,97.708 67.799,97.708 43.575,97.79 58.815,97.79 66.435,97.79 10.16,99.06 11.43,99.06 12.7,99.06 17.145,99.06 19.05,99.06 20.32,99.06 26.035,99.06 27.305,99.06 28.575,99.06 33.655,99.06 34.925,99.06 36.195,99.06 51.195,99.06 52.705,99.06 72.898,99.314 75.184,99.314 80.518,99.314 82.804,99.314 88.138,99.314 90.424,99.314 95.758,99.314 98.044,99.314
GS1: Q1.1 Q2.1 R1.1 R21.2 | length 14.7
  Top Layer w0.5: Q2.1@6.714,101.432 6.714,99.331 8.89,97.155 11.43,97.155 ; R21.2@8.89,94.57 R1.1@11.43,94.57 11.43,97.155 ; v2(13.335,97.155) 11.43,97.155
GS2: Q3.1 Q4.1 R3.1 R25.2 | length 19.6
  Top Layer w0.5: Q4.1@14.714,101.062 14.714,97.046 16.343,95.417 16.343,94.737 R25.2@16.51,94.57 ; R3.1@19.05,94.57 R25.2@16.51,94.57 ; v1(23.495,96.52) 18.56,96.52 16.61,94.57 R25.2@16.51,94.57
  Bottom Layer w0.5: v1(23.495,96.52) Q3.1@25.484,96.52
GS3: Q5.1 Q6.1 R10.1 R22.2 | length 23.2
  Top Layer w0.5: Q6.1@22.714,101.062 22.714,98.571 24.316,96.969 24.316,94.756 R22.2@24.13,94.57 R10.1@26.67,94.57 26.77,94.57 28.72,96.52 v2(37.465,96.52)
  Bottom Layer w0.5: v2(37.465,96.52) 38.185,96.52 38.735,95.97 Q5.1@38.735,95.618
GS4: Q7.1 Q8.1 R12.1 R26.2 | length 32.1
  Top Layer w0.5: Q8.1@30.714,101.062 31.047,100.73 31.047,97.503 v1(31.066,97.484) 35.902,97.484 36.195,97.777 36.195,97.79 38.1,99.695 47.625,99.695 49.53,97.79 49.53,97.173 50.8,95.903 v2(50.8,95.885) ; v1(31.054,95.593) 31.073,95.573 31.073,95.147 31.65,94.57 R26.2@31.75,94.57 R12.1@34.29,94.57
  Bottom Layer w0.5: v1(31.054,95.593) 31.06,95.599 31.06,97.478 v1(31.066,97.484)
HP_LOW_SIDE_OUT_4: D26.1 J5.4 Q19.4 | length 12.7
  Top Layer w1.85: J5.4@92.09,115.75 92.09,115.654 95.065,112.679 95.065,111.075 D26.1@95.24,110.9 95.24,105.215 Q19.4@94.615,104.59
HP_LOWSIDE_PWM_1: D25.1 J5.3 Q18.4 | length 11.7
  Top Layer w1.85: Q18.4@86.995,104.59 87.62,105.215 D25.1@87.62,110.91 87.62,113.01 87.23,113.4 87.23,115.53 J5.3@87.01,115.75
HP_LOWSIDE_PWM_2: D24.1 J5.2 Q17.4 | length 12.2
  Top Layer w1.85: Q17.4@79.375,104.59 80,105.215 D24.1@80,110.91 80,113.82 J5.2@81.93,115.75
HP_LOWSIDE_PWM_3: D23.1 J5.1 Q16.4 | length 13.3
  Top Layer w1.85: Q16.4@71.755,104.59 72.38,105.215 D23.1@72.38,110.91 72.555,111.085 72.555,111.455 J5.1@76.85,115.75
I2C_SCL: R66.1 U11.58 | length 9.1
  Top Layer w0.3: R66.1@93,53.5 93.154,53.5 93.604,53.05 U11.58@101.95,53.05
I2C_SDA: R67.1 U11.59 | length 11.9
  Top Layer w0.3: R67.1@90.5,53.5 90.546,53.5 90.95,53.096 90.95,53.05 91.45,52.55 U11.59@101.95,52.55
IAT-SENSOR: J6.6 R58.1 R59.2 | length 16.2
  Top Layer w0.3: R58.1@106.045,12.335 104.505,12.335 104.14,12.7 104.14,15.875 108.501,20.236 R59.2@109.455,20.236
  Top Layer w0.4: J6.6@106.045,8.48 R58.1@106.045,12.335
"IGN OUT 1": J2.1 Q1.4 Q2.4 | length 12.4
  Bottom Layer w2: Q1.4@10.795,105.41 11.362,105.41 15.01,109.058 J2.1@15.01,115.75
"IGN OUT 2": J2.2 Q3.4 Q4.4 | length 11.8
  Bottom Layer w2: J2.2@20.09,115.75 20.09,108.815 Q3.4@23.495,105.41
"IGN OUT 3": J2.3 Q5.4 Q6.4 | length 16.2
  Bottom Layer w1.5: J2.3@25.17,115.75 28.611,112.309 29.931,112.309 31.408,110.832 31.408,109.308 35.306,105.41 Q5.4@36.195,105.41
"IGN OUT 4": J2.4 Q7.4 Q8.4 | length 23.8
  Bottom Layer w1.5: J2.4@30.25,115.75 34.24,111.76 43.229,111.76 44.108,110.881 44.108,109.308 48.006,105.41 Q7.4@48.895,105.41
"INJ OUT 1": D1.1 J2.5 T1.4 | length 47.5
  Top Layer w1: J2.5@35.33,116.2 J2.5@35.33,115.75 J2.5@35.715,115.75
  Top Layer w1.25: J2.5@35.33,115.75 41.275,109.805 41.275,104.704 T1.4@41.389,104.59 ; J2.5@35.33,116.2 40.005,120.875 60.13,120.875 64.1,116.905 D1.1@64.575,116.43
"INJ OUT 2": D2.1 J2.6 T2.4 | length 33.6
  Top Layer w1.25: T2.4@48.895,104.59 46.927,106.558 46.927,109.233 J2.6@40.41,115.75 43.63,118.97 54.415,118.97 D2.1@56.955,116.43
"INJ OUT 3": D3.1 J2.7 T3.4 | length 19.9
  Top Layer w1.25: J2.7@45.49,115.75 50.525,110.715 D3.1@56.955,110.715 56.955,105.03 T3.4@56.515,104.59
"INJ OUT 4": D4.1 J2.8 T4.4 | length 22.5
  Top Layer w1.25: J2.8@50.57,115.75 50.676,115.75 53.171,113.255 62.865,113.255 64.1,112.02 64.1,111.19 D4.1@64.575,110.715 ; T4.4@64.135,104.59 64.235,104.69 D4.1@64.235,110.49
LED: R62.2 U11.2 | length 17
  Top Layer w0.3: R62.2@91.17,40.64 92.456,40.64 97.657,45.841 100.522,45.841 101.417,46.736 104.324,46.736 104.5,46.912 U11.2@104.5,48
LOWSIDE_GATE_1: R140.2 U16.5 | length 2.7
  Top Layer w0.5: U16.5@91.477,90.43 91.496,90.449 91.496,91.356 92.36,92.22 92.36,92.32 92.61,92.57 R140.2@92.71,92.57
LP_LOW_SIDE_OUT_1: J5.9 Q15.12 | length 12.2
  Top Layer w0.6: Q15.12@109.22,109.095 109.22,111.125 111.125,113.03 114.77,113.03 J5.9@117.49,115.75
LP_LOW_SIDE_OUT_2: J5.10 Q15.11 | length 15.7
  Top Layer w0.6: Q15.11@110.49,109.095 110.49,110.49 111.76,111.76 118.58,111.76 J5.10@122.57,115.75
MAIN_RELAY_OUT: J5.5 Q15.16 | length 11.3
  Top Layer w0.6: J5.5@97.17,115.75 97.629,115.291 98.704,115.291 100.965,113.03 102.87,113.03 104.14,111.76 Q15.16@104.14,109.095
MAP-SENSOR: J6.5 R53.2 R56.1 | length 23.2
  Top Layer w0.3: R56.1@102.235,12.335 100.695,12.335 100.33,12.7 100.33,15.875 105.691,21.236 110.663,21.236 111.663,20.236 R53.2@111.763,20.236
  Top Layer w0.4: J6.5@102.235,8.48 R56.1@102.235,12.335
NetC7_2: C7.2 C8.2 C13.2 C14.2 FB1.1 U5.1 U6.3 U7.3 | length 44.5
  Top Layer w0.8: FB1.1@51.565,62.23 54.244,62.23 v1(55.499,60.975) 59.545,60.975 C13.2@60.83,59.69 58.704,57.564 58.704,56.46 U7.3@58.519,56.275 ; v1(55.879,48.515) 55.879,48.476 59.27,45.085 57.6,43.415 v1(57.6,41.67) 58.608,41.67 59.016,42.078 C8.2@60.83,42.078 ; U7.3@58.58,56.336 59.511,56.336 59.676,56.501 60.775,56.501 v1(60.957,56.683) ; 59.505,45.085 C7.2@60.83,45.085
  Bottom Layer w0.8: v1(55.499,60.975) 55.499,48.895 v1(55.879,48.515) ; U5.1@56.996,42.1 57.475,42.1 57.6,41.976 v1(57.6,41.67)
NetC39_2: C39.2 U11.5 X1.1 | length 9.4
  Top Layer w0.3: C39.2@98.5,44.5 98.55,44.55 100.56,44.55 X1.1@100.61,44.6 100.61,44.619 101.141,45.15 101.16,45.15 102.01,46 104.75,46 105.673,46.923 105.677,46.923 106,47.246 U11.5@106,48
NetC40_2: C40.2 U11.6 X1.3 | length 9.7
  Top Layer w0.3: X1.3@102.61,42.4 102.61,42.419 103.141,42.95 103.16,42.95 104,43.79 104,44.5 106.5,47 U11.6@106.5,48
  Top Layer w0.4: C40.2@102.5,40 102.61,40.11 X1.3@102.61,42.4
NetC42_2: C42.2 U11.30 | length 2.5
  Top Layer w0.3: U11.30@113.55,56.55 115.902,56.55 C42.2@116,56.5
NetC43_2: C43.2 R45.1 SW2.1 SW2.4 U11.7 | length 29.6
  Top Layer w0.3: SW2.1@82.09,47.62 82.186,47.716 83.206,47.716 83.39,47.9 86.79,47.9 86.974,47.716 87.994,47.716 SW2.4@88.09,47.62 88.39,47.62 89.01,47 90.525,47 C43.2@90.805,46.72 91.093,46.432 91.533,46.432 R45.1@93.245,44.72 ; R45.1@93.345,44.72 94.98,46.355 100.305,46.355 103.48,49.53 106.68,49.53 107,49.21 U11.7@107,48
NetC56_1: C56.1 D21.1 Q12.1 R108.1 | length 8.2
  Top Layer w0.4: R108.1@37.37,18.685 C56.1@37.37,16.145 D21.1@40.18,16.145 40.15,16.115 Q12.1@40.15,13.335
NetC56_2: C56.2 R104.2 R107.1 R108.2 | length 7.6
  Top Layer w0.4: R104.2@35.37,13.605 C56.2@35.37,16.145 R108.2@35.37,18.685 R107.1@35.37,21.225
NetC57_2: C57.2 R106.1 R107.2 | length 5
  Top Layer w0.4: R107.2@37.37,21.225 R106.1@39.815,21.225 C57.2@39.815,18.685
NetC59_1: C59.1 D22.1 Q14.1 R124.1 | length 8.2
  Top Layer w0.4: R124.1@37.37,31.4 C59.1@37.37,28.86 D22.1@40.18,28.86 40.15,28.83 Q14.1@40.15,26.05
NetC59_2: C59.2 R120.2 R123.1 R124.2 | length 7.6
  Top Layer w0.4: R120.2@35.37,26.32 C59.2@35.37,28.86 R124.2@35.37,31.4 R123.1@35.37,33.94
NetC60_2: C60.2 R122.1 R123.2 | length 5
  Top Layer w0.4: R123.2@37.37,33.94 R122.1@39.815,33.94 C60.2@39.815,31.4
NetD5_1: D5.1 R21.1 | length 3.7
  Top Layer w0.5: D5.1@6.35,94.97 6.65,94.97 8.54,93.08 8.54,92.82 8.79,92.57 R21.1@8.89,92.57
NetD6_1: D6.1 R22.1 | length 3.7
  Top Layer w0.5: D6.1@21.59,94.97 21.89,94.97 23.78,93.08 23.78,92.82 24.03,92.57 R22.1@24.13,92.57
NetD7_1: D7.1 R23.1 | length 2.7
  Top Layer w0.5: R23.1@39.37,92.57 41.21,92.57 41.61,92.17 D7.1@41.91,92.17
NetD8_1: D8.1 R24.1 | length 2.7
  Top Layer w0.5: R24.1@54.61,92.57 56.45,92.57 56.85,92.17 D8.1@57.15,92.17
NetD9_1: D9.1 R25.1 | length 3.7
  Top Layer w0.5: D9.1@13.97,94.97 14.27,94.97 16.16,93.08 16.16,92.82 16.41,92.57 R25.1@16.51,92.57
NetD10_1: D10.1 R26.1 | length 3.7
  Top Layer w0.5: D10.1@29.21,94.97 29.51,94.97 31.4,93.08 31.4,92.82 31.65,92.57 R26.1@31.75,92.57
NetD11_1: D11.1 R27.1 | length 2.7
  Top Layer w0.5: R27.1@46.99,92.57 48.83,92.57 49.23,92.17 D11.1@49.53,92.17
NetD12_1: D12.1 R28.1 | length 2.7
  Top Layer w0.5: R28.1@62.23,92.57 64.07,92.57 64.47,92.17 D12.1@64.77,92.17
NetD13_2: D13.2 D14.2 D15.2 F2.2 Q9.4 Q10.4 | length 46.4
  Top Layer w0.8: D15.2@24.792,53.065 24.792,59.52 Q10.4@25.957,60.685
  Top Layer w2: D13.2@15.162,53.117 15.212,53.167 15.212,54.44 16.377,55.605 F2.2@16.432,55.605 16.504,55.605 18.627,53.482 20.102,53.482 20.152,53.432 D14.2@20.152,53.117 ; 18.954,66.382 19.184,66.382 ; Q9.4@25.917,72.115 24.917,72.115 19.184,66.382 ; Q10.4@25.937,60.705 24.937,60.705 19.26,66.382 19.184,66.382
  Top Layer w4: F2.2@16.432,55.605 F2.2@16.432,61.32 16.432,63.86 18.954,66.382 ; Q10.4@25.937,60.705 Q10.4@25.957,60.685
NetD15_1: D15.1 Q9.1 Q10.1 R30.2 | length 25
  Top Layer w0.8: D15.1@28.392,53.065 31.881,53.065 32.281,53.465 32.281,54.269 32.942,54.93 32.942,58.145 ; Q9.1@36.117,69.575 36.056,69.514 36.056,68.244 32.942,65.13 32.942,58.145 ; Q10.1@36.157,58.145 32.942,58.145
NetD16_1: D16.1 R29.1 | length 4.3
  Top Layer w0.3: R29.1@73.025,12.57 73.1,12.57 75.9,15.37 D16.1@76.2,15.37
NetD17_1: D17.1 R31.1 | length 4.2
  Top Layer w0.3: R31.1@126.832,44.32 126.967,44.32 128.27,45.623 128.27,46.145 129.245,47.12 D17.1@129.54,47.12
NetD18_1: D18.1 R62.1 | length 2.7
  Top Layer w0.4: D18.1@86.49,40.64 88.243,40.64 R62.1@89.17,40.64
NetD19_2: D19.2 R63.1 R71.2 | length 5.7
  Top Layer w0.5: R71.2@117.11,71.12 116.86,71.37 116.86,72.354 116.57,72.644 R63.1@116.57,73.66 D19.2@119.485,73.66
NetD20_1: D20.1 J7.A4B9 J7.B4A9 | length 14.2
  Top Layer w0.4: J7.A4B9@156,69.9 156.048,69.948 156.677,69.948 156.789,70.06 157.055,70.06 158.115,71.12 158.115,74.93 ; J7.B4A9@156,74.6 156.048,74.552 156.677,74.552 156.789,74.44 157.451,74.44 157.941,74.93 158.115,74.93 ; D20.1@159.7,79.5 159.4,79.5 158.115,78.215 158.115,74.93
NetF1_2: F1.2 FB1.2 | length 2.9
  Top Layer w1: F1.2@45.85,62.23 FB1.2@48.765,62.23
NetF2_1: F2.1 J1.5 J1.6 | length 18.2
  Top Layer w3: J1.5@10.16,71.12 10.52,71.48 F2.1@16.432,71.48 ; J1.6@10.16,76.2 15.437,76.2 F2.1@16.432,77.195
  Top Layer w4: J1.5@10.16,71.12 J1.6@10.16,76.2
NetQ11_1: Q11.1 R96.2 | length 5.9
  Top Layer w0.4: Q11.1@25.5,12.344 26.45,12.344 28.95,9.844 R96.2@30.35,9.844
NetQ11_2: Q11.2 R93.2 R94.1 | length 7
  Top Layer w0.4: Q11.2@23.5,12.344 23.5,12.594 25.231,14.325 25.231,14.675 R94.1@25.5,14.944 25.5,16.176 24.816,16.861 24.816,18.179 R93.2@24.8,18.194
NetQ12_2: Q12.2 R102.2 R105.1 | length 21
  Top Layer w0.4: R105.1@26.8,20.794 26.8,20.694 31.02,16.474 31.02,12.97 34.195,9.795 36.735,9.795 37.186,10.246 37.186,10.881 R102.2@37.37,11.065 38.648,11.065 38.918,11.335 Q12.2@40.15,11.335